# Altium PCB Shield.PcbDoc
Units mm, origin at the board's own origin, x right, y up, seen from the top; angles counter-clockwise.
Board outline 57.42 x 53.34 mm, 2 copper layers (Top Layer, Bottom Layer); 18 components, 23 nets, 107 pads, 5 vias.
Unrouted connection lines stored in the file: 1.
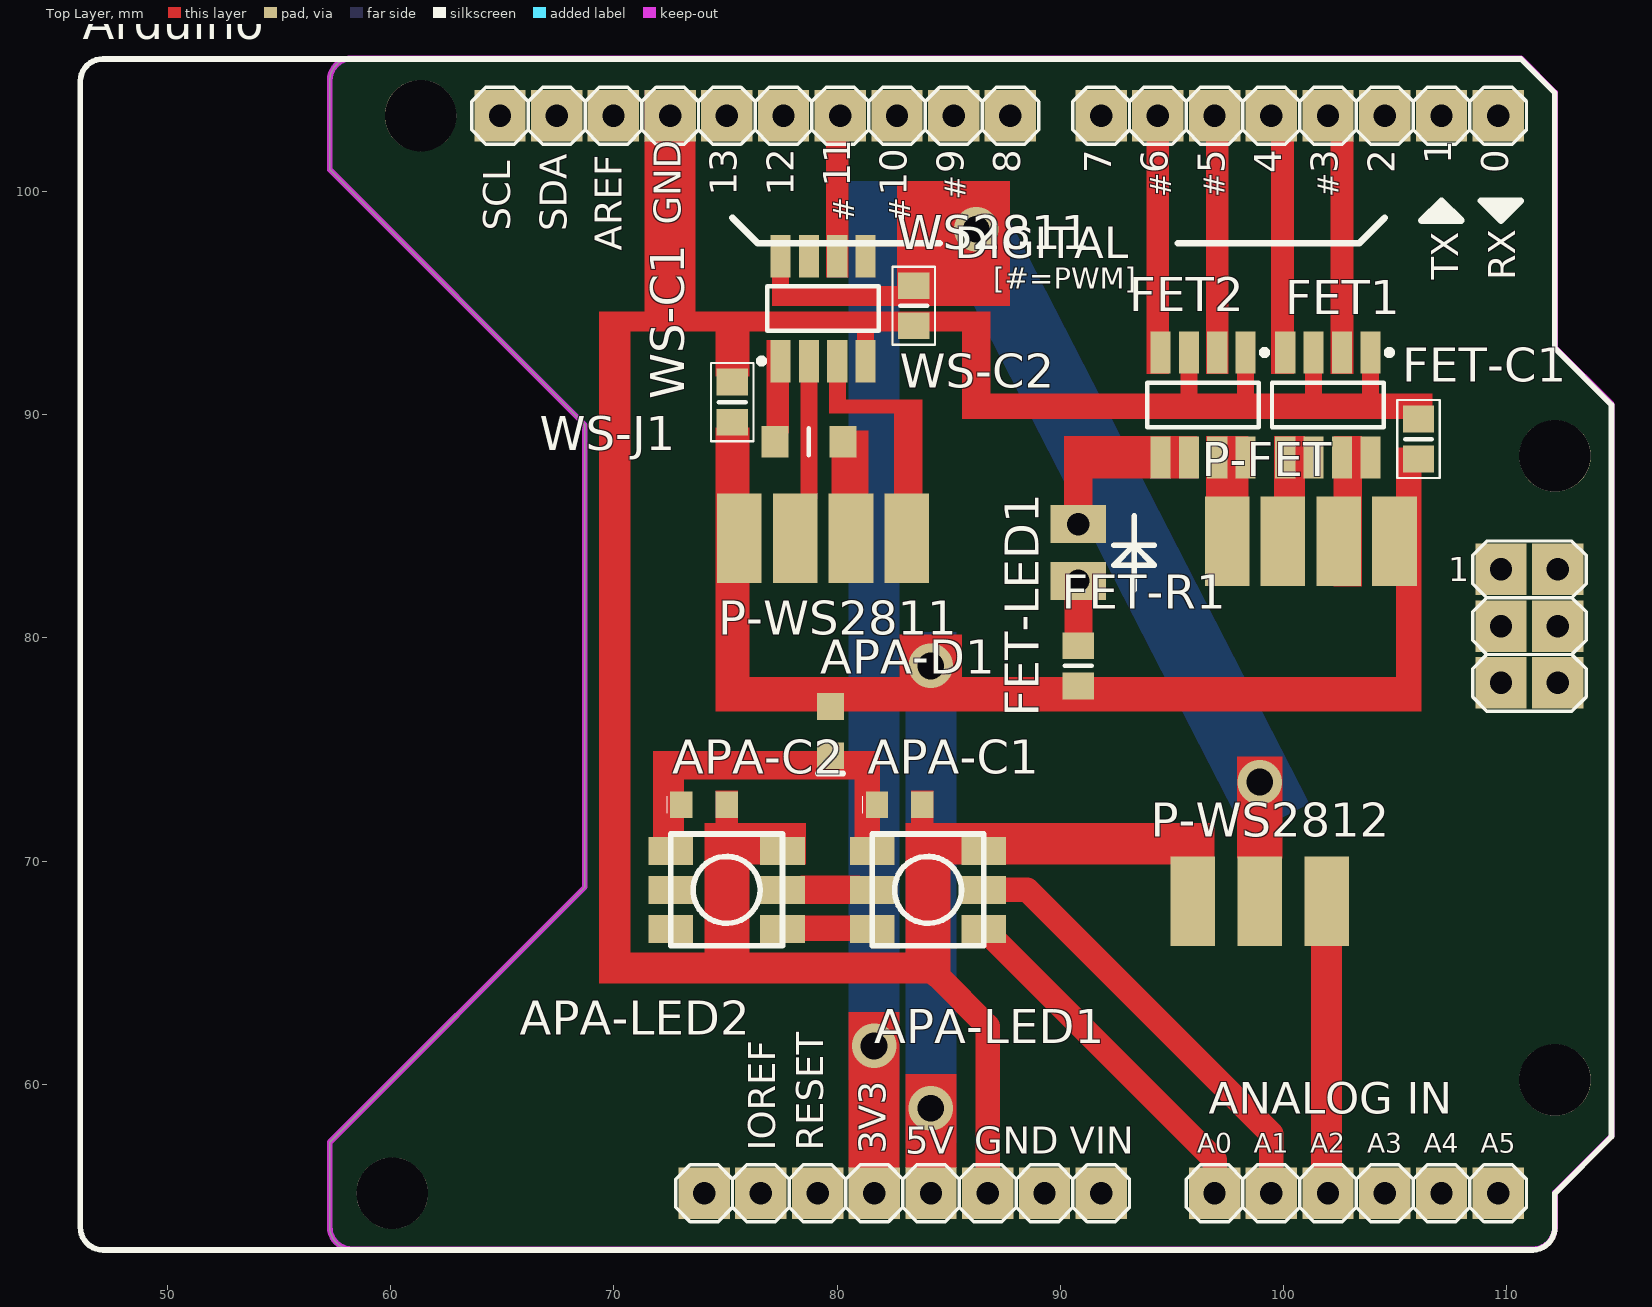
[diagram p0: Top Layer view]
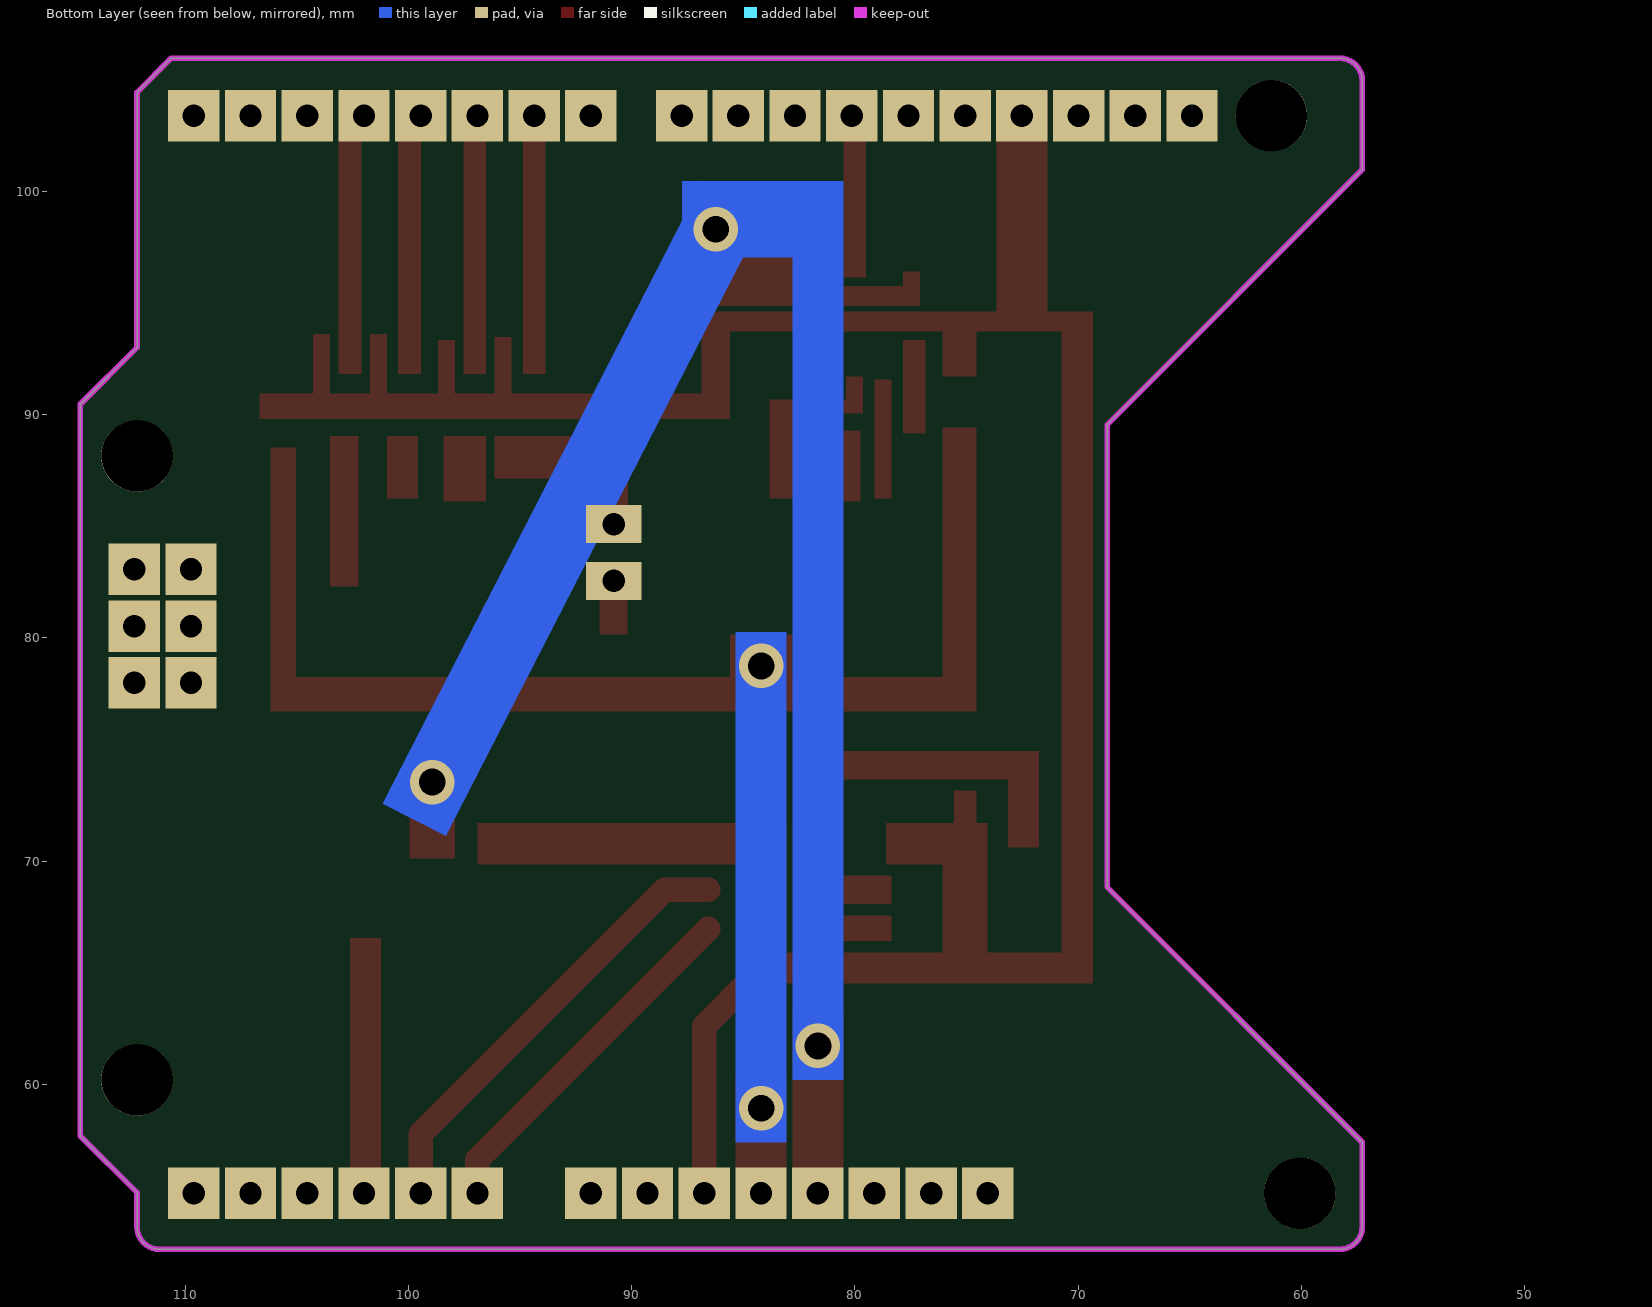
[diagram p1: Bottom Layer view, seen from below]
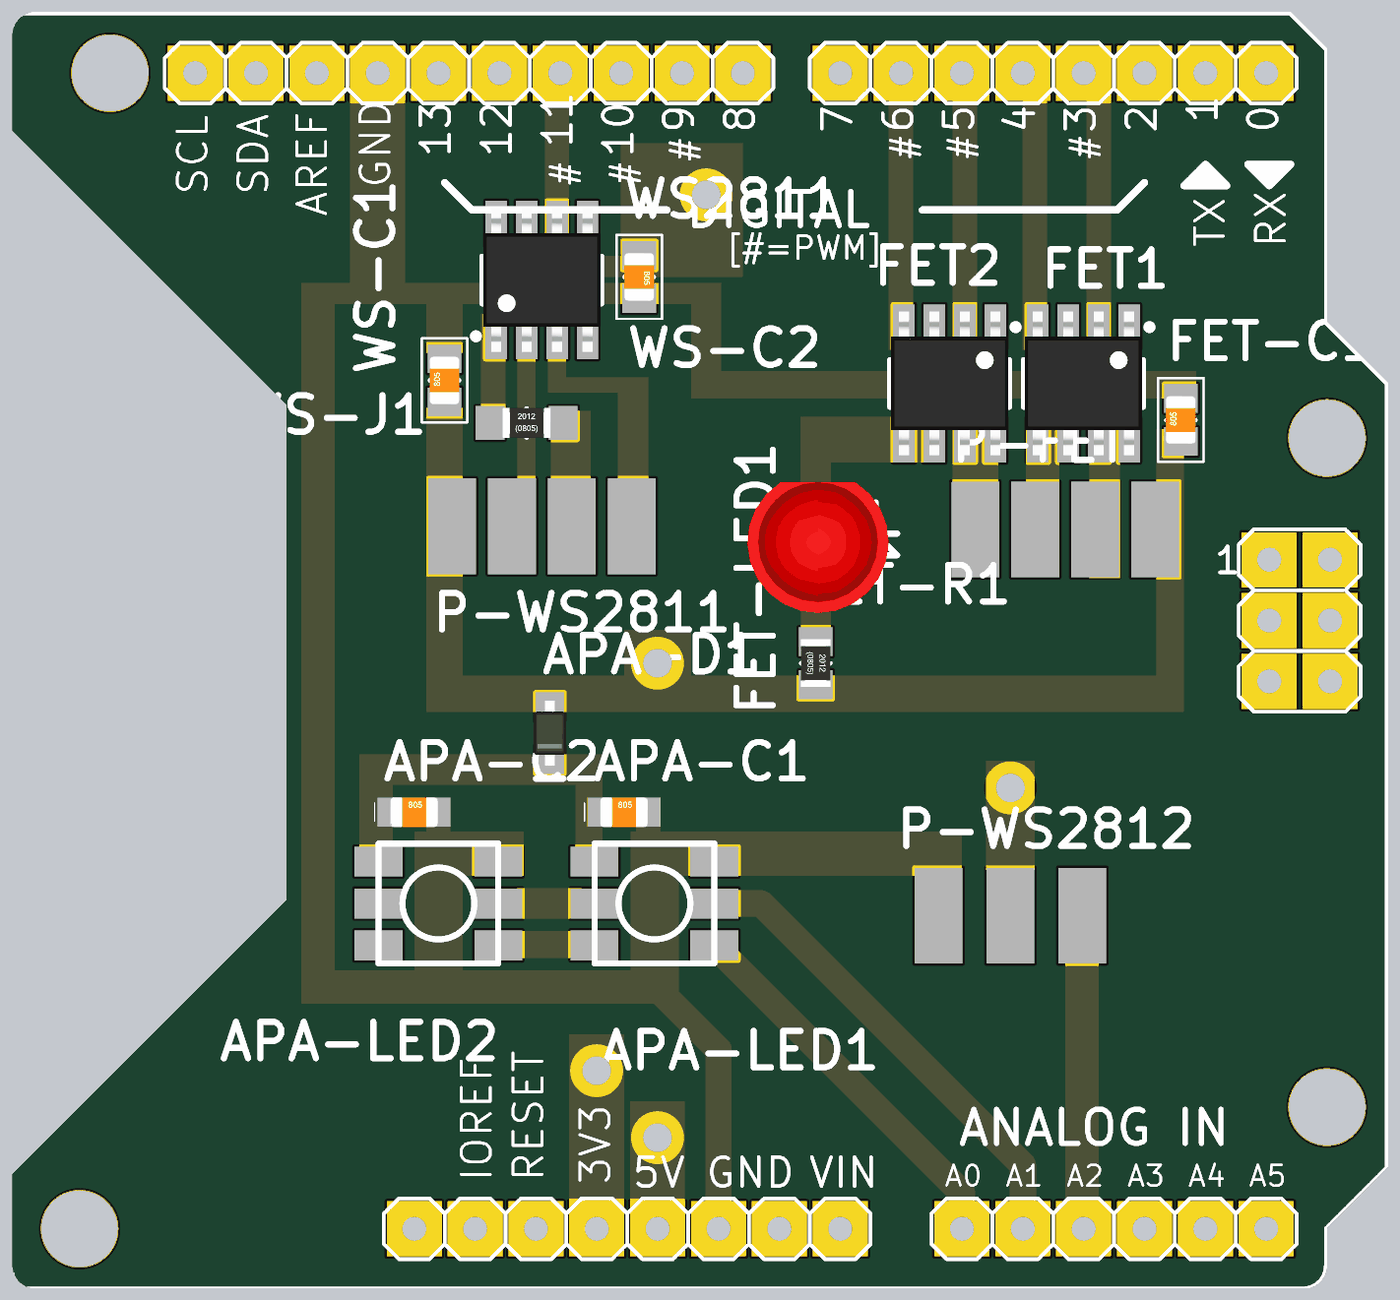
[diagram p2: 3D render of the assembled board from above, using the file's embedded part models]

## Layer stack, top to bottom
Top Solder: solder mask 0.0102, Solder Resist, Dk 3.5
Top Layer: signal copper 0.0356
Dielectric 1: dielectric 0.32, FR-4, Dk 4.8
Bottom Layer: signal copper 0.0356
Bottom Solder: solder mask 0.0102, Solder Resist, Dk 3.5

## Board outline
57.277,53.627 ccw(c58.293,53.627) 58.293,52.611 111.163,52.611 ccw(c111.151,53.614) 112.154,53.627 112.154,55.151 114.694,57.691 114.694,90.457 112.154,92.997 112.154,104.427 110.63,105.951 58.293,105.951 ccw(c58.28,104.948) 57.277,104.96 57.277,100.965 68.707,89.535 68.707,68.834 57.277,57.404

## Design rules (kind name [scope] priority, off if disabled: settings)
Clearance [All] p1: gap=0.254
PolygonConnect [All] p1: connectstyle=Relief reliefconductorwidth=0.254 reliefentries=4 polygonreliefangle="90 Angle" airgapwidth=0.254
RoutingVias [All] p1: holewidth=0.711 width=1.27 viastyle="Through Hole" minholewidth=0.711 minwidth=1.27 maxholewidth=0.711 maxwidth=1.27
SolderMaskExpansion [All] p1: expansion=0.102
Width [All] p1: maxlimit=0.254 minlimit=0.254 preferedwidth=0.254
30 further rules are at their usual default settings.

## Classes and differential pairs
component class Top: Arduino
component class "LED Strip 1": FET1 FET2 FET-C1 FET-LED1 FET-R1 P-FET
component class "LED Strip 2": P-WS2811 WS2811 WS-C1 WS-C2 WS-J1
component class "2x SMD LED": APA-C1 APA-C2 APA-D1 APA-LED1 APA-LED2
component class "LED Strip 3": P-WS2812

## Components (designator, comment, footprint, x,y, rotation, side; value= is the part's Value field where it differs from the comment)
APA-C1 "100nF" "C 0805 wide" 82.804,72.517 r0 top
APA-C2 "100nF" "C 0805 wide" 74.041,72.517 r0 top
APA-D1 "SK14" SC-90 79.629,75.819 r90 top
APA-LED1 "APA102" "LED SMD 5X5MM" 84.074,68.707 r180 top
APA-LED2 "APA102" "LED SMD 5X5MM" 75.057,68.707 r180 top
Arduino "Uno" "Arduino Uno" 82.169,79.121 r0 top
FET1 "IRF7301" SOIC-8 101.981,90.424 r270 top
FET2 "IRF7301" SOIC-8 96.393,90.424 r270 top
FET-C1 "100nF" "C 0805 / 2012" 106.045,88.9 r90 top
FET-LED1 "through hole, 2mm, yellow" "LED 3mm" 90.805,82.55 r90 top
FET-R1 "?R" "R 0805 / 2012" 90.805,78.74 r270 top
P-FET "LED strip RGB" "LED strip RGB connector" 101.219,84.328 r180 top
P-WS2811 "LED strip RGB" "LED strip RGB connector" 79.375,84.455 r0 top
P-WS2812 "Addressable LED Strip Connector" "LED STRIP 3 PADS" 98.933,68.199 r180 top
WS2811 "WS2811S" SOIC-8 79.375,94.742 r90 top
WS-C1 "100nF" "C 0805 / 2012" 75.311,90.551 r90 top
WS-C2 "100nF" "C 0805 / 2012" 83.439,94.869 r270 top
WS-J1 "0R" "R 0805 / 2012 wide" 78.74,88.773 r0 top

## Footprints (in the part's own frame and the unit in brackets; to place one, negate y for a bottom-side part, rotate by r counter-clockwise, add the part's x,y. Pads: shape width x height; smd on the part's side, far side on the other; paste and mask are expansions set on the pad)
"Arduino Uno" [mm]
  rect 2.3x2.3 hole 1: 0(27.44,24.26) 1(24.9,24.26) 2(22.36,24.26) 3(19.82,24.26) 3V3(-0.5,-24) 4(17.28,24.26) 5(14.74,24.26) 5V(2.04,-24) 6(12.2,24.26) 7(9.66,24.26) 8(5.596,24.26) 9(3.056,24.26) 10(0.516,24.26) 11(-2.024,24.26) 12(-4.564,24.26) 13(-7.104,24.26) A0(14.74,-24) A1(17.28,-24) A2(19.82,-24) A3(22.36,-24) A4(24.9,-24) A5(27.44,-24) AREF(-12.184,24.26) GND1(4.58,-24) GND2(7.12,-24) GND3(-9.644,24.26) ICSP1(27.567,3.94) ICSP2(30.107,3.94) ICSP3(27.567,1.4) ICSP4(30.107,1.4) ICSP5(27.567,-1.14) ICSP6(30.107,-1.14) IOREF(-5.58,-24) NC(-8.12,-24) RESET(-3.04,-24) SCL(-17.264,24.26) SDA(-14.724,24.26) Vin(9.66,-24)
  round 3.2 hole 3.2: H1(-20.82,24.26) H2(-22.09,-24) H3(29.98,-18.92) H4(29.98,9.02)
  Bottom Layer lines w0.305: -14.724,24.26 -14.47,24.26
  silkscreen extent -36.06,-26.54 32.52,26.8
"C 0805 / 2012" [mm] "Capacitor 0805 / 2012 (2.0 x 1.2 mm)"
  rect 1.2x1.4 smd: 1(-0.9,0) 2(0.9,0)
  silkscreen extent -1.75,-0.95 1.75,0.95, body extent -1,-0.62 1,0.62, height 0.78
"C 0805 wide" [mm]
  rect 1x1.2 smd mask+0.01: 1(-1.016,0) 2(1.016,0)
  silkscreen extent -1.65,-0.38 -1.65,0.38, body extent -1,-0.62 1,0.63, height 0.78
"LED 3mm" [mm] "2.54mm"
  rect 1.7x2.5 hole 1: 1(0,0) 2(2.54,0)
  silkscreen extent -0.4,-3.4 2.9,-1.6, body extent -1.71,-3.05 3.74,2.85, height 18.6
"LED SMD 5X5MM" [mm]
  rect 2x1.25 smd: 1(-2.5,1.75) 2(-2.5,0) 3(-2.5,-1.75) 4(2.5,-1.75) 5(2.5,0) 6(2.5,1.75)
  Top Layer region: -1,-3 1,-3 1,3 -1,3
  silkscreen extent -2.5,-2.5 2.5,2.5
"LED STRIP 3 PADS" [mm]
  rect 2x4 smd: 1(-3,0) 2(0,0) 3(3,0)
"LED strip RGB connector" [mm]
  rect 2x4 smd: 1(-3.75,0) 2(-1.25,0) 3(1.25,0) 4(3.75,0)
"R 0805 / 2012" [mm] "Resistor 0805 / 2012 (2.0 x 1.2 mm)"
  rect 1.2x1.4 smd: 1(-0.9,0) 2(0.9,0)
  silkscreen extent 0,-0.6 0,0.6, body extent -1,-0.62 1,0.62, height 0.45
"R 0805 / 2012 wide" [mm] "Resistor 0805 / 2012 (2.0 x 1.2 mm)"
  rect 1.2x1.4 smd: 1(-1.524,0) 2(1.524,0)
  silkscreen extent 0,-0.6 0,0.6, body extent -1,-0.62 1,0.62, height 0.45
SC-90 [mm]
  rect 1.2x1.2 smd: 1(-1.1,-0.075) 2(1.1,-0.075)
  silkscreen extent -1.9,-0.65 -1.9,0.5, body extent -1.35,-0.75 1.35,0.6, height 0.85
SOIC-8 [mm]
  rect 1.9x0.9 smd: 1(-2.35,1.905) 2(-2.35,0.635) 3(-2.35,-0.635) 4(-2.35,-1.905) 5(2.35,-1.905) 6(2.35,-0.635) 7(2.35,0.635) 8(2.35,1.905)
  silkscreen extent -2.47,-2.5 1,2.88, body extent -3,-2.45 3,2.45, height 1.75

## Part data
APA-C1 APA-C2 FET-C1 WS-C1 WS-C2: library part Capacitor
APA-D1: library part Diode
Arduino: library part "Arduino Uno"
FET-LED1: library part LED
FET-R1 WS-J1: library part Resistor
P-WS2812: library part "LED strip WS2812"
WS2811: "RGB LED Controller"

## Via types
v1: diameter 2, hole 1.2, Top Layer to Bottom Layer, 5 vias

## Nets (pads, with @x,y where several pads share a name; then routed paths per layer and width w, separated by ;. In a path a pad name is that pad's centre, name@x,y a point inside that pad or via, vN(x,y) a via of type N, cw(c..) or ccw(c..) an arc to the next point about the centre after c; other vN are vias at no path point)
3V3: Arduino.3V3 P-WS2812.2 WS2811.8 WS-C2.1
  other v1: 81.661,61.722 98.933,73.533 86.233,98.298
4V45: APA-C1.1 APA-C2.1 APA-D1.1 APA-LED1.4 APA-LED2.4
5V: APA-D1.2 Arduino.5V FET-C1.1 FET-R1.2 P-FET.1 P-WS2811.1 WS-C1.1
  other v1: 84.201,58.928 84.201,78.74
APA102-CLOCK: APA-LED1.2 Arduino.A1 | length 20.1
  Top Layer w1.1: APA-LED1.2 88.519,68.707 99.449,57.777 Arduino.A1
APA102-DATA: APA-LED1.1 Arduino.A0 | length 16.1
  Top Layer w1.1: APA-LED1.1 96.909,56.622 Arduino.A0
B: P-WS2811.4 WS2811.3
G: P-WS2811.2 WS2811.2
GATE-B: Arduino.5 FET2.2
GATE-G: Arduino.3 FET1.2
GATE-R: Arduino.4 FET1.4
GATE-TH: Arduino.6 FET2.4
GND: APA-C1.2 APA-C2.2 APA-LED1.3 APA-LED2.3 Arduino.GND1 Arduino.GND2 Arduino.GND3 FET1.1 FET1.3 FET2.1 FET2.3 FET-C1.2 P-WS2812.3 WS2811.4 WS-C1.2 WS-C2.2 | length 11.1
  Top Layer w0.254: 84.455,64.897 84.455,65.278
  Top Layer w1.1: 84.455,64.897 86.749,62.603 Arduino.GND1
NetAPA-LED1_5: APA-LED1.5 APA-LED2.2
NetAPA-LED1_6: APA-LED1.6 APA-LED2.1
NetArduino_A2: Arduino.A2 P-WS2812.1
NetFET1_5: FET1.5 FET1.6 P-FET.3
NetFET1_7: FET1.7 FET1.8 P-FET.2
NetFET2_5: FET2.5 FET2.6 FET-LED1.2
NetFET2_7: FET2.7 FET2.8 P-FET.4
NetFET-LED1_1: FET-LED1.1 FET-R1.1
R1: WS2811.1 WS-J1.1
R2: P-WS2811.3 WS-J1.2
WS2811-DATA: Arduino.11 WS2811.6
pads on no net: APA-LED2.5 APA-LED2.6 Arduino.0 Arduino.1 Arduino.2 Arduino.7 Arduino.8 Arduino.9 Arduino.10 Arduino.12 Arduino.13 Arduino.A3 Arduino.A4 Arduino.A5 Arduino.AREF Arduino.H1 Arduino.H2 Arduino.H3 Arduino.H4 Arduino.ICSP1 Arduino.ICSP2 Arduino.ICSP3 Arduino.ICSP4 Arduino.ICSP5 Arduino.ICSP6 Arduino.IOREF Arduino.NC Arduino.RESET Arduino.SCL Arduino.SDA Arduino.Vin WS2811.5 WS2811.7

## Keep-outs
Keep-Out Layer:
  the board outline again, w0.254

## Other copper
Top Layer:
  rectangle net 4V45: 71.755,70.612 73.152,74.93
  rectangle net 4V45: 73.152,73.66 80.772,74.93
  rectangle net GND: 74.057,69.85 78.613,71.707
  rectangle net 4V45: 80.772,70.612 81.915,74.93
  rectangle net GND: 83.074,69.85 96.901,71.707
  rectangle net GND: 69.342,64.516 85.09,65.913
  rectangle net NetAPA-LED1_6: 78.359,66.421 81.026,67.564
  rectangle net NetAPA-LED1_5: 78.359,68.072 81.026,69.342
  region net 5V: 105.029,88.519 105.029,78.232 106.172,78.232 106.172,88.519
  region net NetFET1_7: 102.235,89.027 102.235,82.296 103.505,82.296 103.505,89.027
  region net NetFET1_5: 99.568,89.027 99.568,86.233 100.965,86.233 100.965,89.027
  region net NetFET2_7: 96.52,89.027 96.52,86.106 98.425,86.106 98.425,89.027
  region net 3V3: 77.089,96.393 77.089,95.25 77.851,95.25 77.851,96.393
  region net GND: 80.899,94.107 80.899,93.218 81.661,93.218 81.661,94.107
  region net 3V3: 77.089,95.758 77.089,94.869 84.201,94.869 84.201,95.758
  region net GND: 74.549,93.726 74.549,91.694 76.073,91.694 76.073,93.726
  region net GND: 70.612,94.615 70.612,93.726 85.598,93.726 85.598,94.615
  region net 5V: 74.549,89.408 74.549,77.851 76.073,77.851 76.073,89.408
  region net B: 82.55,90.043 82.55,86.233 83.82,86.233 83.82,90.043
  region net B: 80.264,90.678 80.264,90.043 83.82,90.043 83.82,90.678
  region net B: 79.629,91.694 79.629,90.043 80.391,90.043 80.391,91.694
  region net G: 78.359,91.567 78.359,86.233 79.121,86.233 79.121,91.567
  region net R1: 76.835,93.345 76.835,89.154 77.851,89.154 77.851,93.345
  region net R2: 79.756,89.281 79.756,86.106 81.407,86.106 81.407,89.281
  region net NetFET2_5: 90.17,89.027 90.17,84.963 91.44,84.963 91.44,89.027
  region net NetFET2_5: 91.313,89.027 91.313,87.122 96.139,87.122 96.139,89.027
  region net 5V: 74.549,78.232 74.549,76.708 106.172,76.708 106.172,78.232
  region net GND: 85.598,90.932 85.598,89.789 106.68,89.789 106.68,90.932
  region net GND: 103.505,93.599 103.505,90.551 104.267,90.551 104.267,93.599
  region net GND: 100.965,93.599 100.965,90.424 101.727,90.424 101.727,93.599
  region net GND: 97.917,93.345 97.917,90.297 98.679,90.297 98.679,93.345
  region net GND: 95.377,93.472 95.377,90.424 96.139,90.424 96.139,93.472
  rectangle net GND: 85.598,90.551 86.868,94.615
  rectangle net GATE-TH: 93.853,91.821 94.869,102.87
  rectangle net GATE-B: 96.52,91.821 97.536,102.489
  rectangle net GATE-R: 99.441,91.821 100.457,102.489
  rectangle net GATE-G: 102.108,91.821 103.124,102.616
  rectangle net WS2811-DATA: 79.502,96.139 80.518,102.87
  rectangle net GND: 71.374,93.726 73.66,104.521
  region net NetFET-LED1_1: 90.181,83.312 90.181,80.137 91.451,80.137 91.451,83.312
  rectangle net NetArduino_A2: 101.219,55.626 102.616,66.548
  rectangle net GND: 69.342,65.913 70.739,94.615
  rectangle net GND: 83.074,65.913 85.09,69.85
  rectangle net 5V: 82.804,77.851 85.598,80.137
  rectangle net GND: 83.312,71.501 84.328,73.152
  rectangle net GND: 74.549,71.501 75.565,73.152
  rectangle net 3V3: 97.917,70.104 99.949,74.676
  rectangle net 5V: 83.058,56.261 85.344,60.452
  rectangle net 3V3: 80.518,56.134 82.804,63.246
  rectangle net GND: 74.057,65.913 76.073,69.85
  rectangle net 3V3: 82.677,94.869 87.757,100.457
Bottom Layer:
  rectangle net 5V: 83.058,57.404 85.344,80.264
  rectangle net 3V3: 80.518,60.198 82.804,100.457
  rectangle net 3V3: 82.677,97.028 87.757,100.457
  region net 3V3: 83.989,99.033 98.33,71.119 101.154,72.57 86.814,100.484

## Text inside footprints (layer, text, board x,y; h text height)
Arduino: Top Overlay "SDA" at 67.898,98.208 h1.21 r90; Top Overlay "SCL" at 65.369,98.221 h1.21 r90; Top Overlay "#" at 85.769,99.621 h0.95 r90; Top Overlay "#" at 94.969,99.721 h0.95 r90; Top Overlay "#" at 102.469,99.721 h0.95 r90; Top Overlay "#" at 97.369,99.721 h0.95 r90; Top Overlay "#" at 83.269,98.621 h0.95 r90; Top Overlay "#" at 80.769,98.621 h0.95 r90; Top Overlay "[#=PWM]" at 87.003,95.634 h0.95; Top Overlay "0" at 110.056,100.797 h1.21 r90; Top Overlay "1" at 107.516,101.2 h1.21 r90; Top Overlay "2" at 104.976,100.797 h1.21 r90; Top Overlay "3" at 102.436,100.797 h1.21 r90; Top Overlay "4" at 99.896,100.797 h1.21 r90; Top Overlay "5" at 97.356,100.797 h1.21 r90; Top Overlay "6" at 94.816,100.797 h1.21 r90; Top Overlay "7" at 92.276,100.797 h1.21 r90; Top Overlay "8" at 88.212,100.797 h1.21 r90; Top Overlay "9" at 85.672,100.797 h1.21 r90; Top Overlay "10" at 83.132,99.79 h1.21 r90; Top Overlay "11" at 80.592,100.193 h1.21 r90; Top Overlay "12" at 78.052,99.79 h1.21 r90; Top Overlay "13" at 75.512,99.79 h1.21 r90; Top Overlay "RX" at 110.371,96.015 h1.21 r90; Top Overlay "TX" at 107.831,96.04 h1.21 r90; Top Overlay "DIGITAL" at 85.276,97.006 h1.42; Top Overlay "IOREF" at 77.224,57.026 h1.21 r90; Top Overlay "GND" at 86.139,56.899 h1.21; Top Overlay "VIN" at 90.432,56.899 h1.21; Top Overlay "A5" at 108.822,56.924 h0.86; Top Overlay "A4" at 106.282,56.924 h0.86; Top Overlay "A3" at 103.742,56.924 h0.86; Top Overlay "A2" at 101.202,56.924 h0.86; Top Overlay "A1" at 98.662,56.924 h0.86; Top Overlay "3V3" at 82.177,56.899 h1.21 r90; Top Overlay "RESET" at 79.383,57.026 h1.21 r90; Top Overlay "GND" at 72.997,98.507 h1.21 r90; Top Overlay "1" at 107.374,82.528 h1.08; Top Overlay "AREF" at 70.355,97.324 h1.21 r90; Top Overlay "ANALOG IN" at 96.655,58.677 h1.42; Top Overlay "A0" at 96.122,56.924 h0.86; Top Overlay "5V" at 83.066,56.899 h1.21